# EAGLE board DDS_shield (EAGLE 7.5.0)
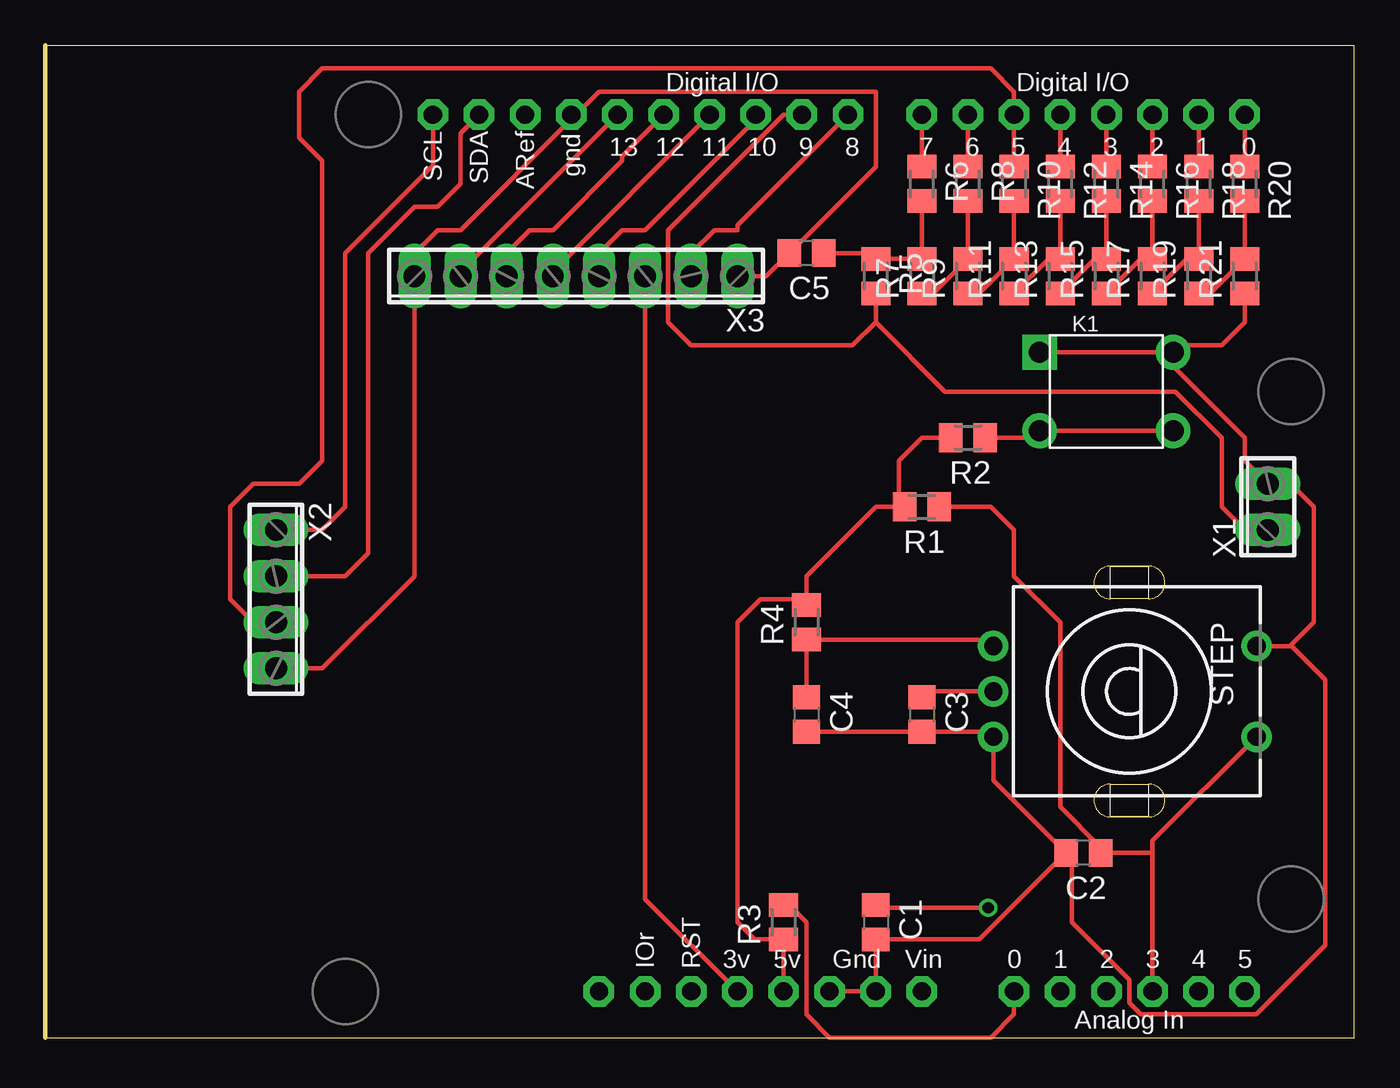
[diagram p0: board, top side]
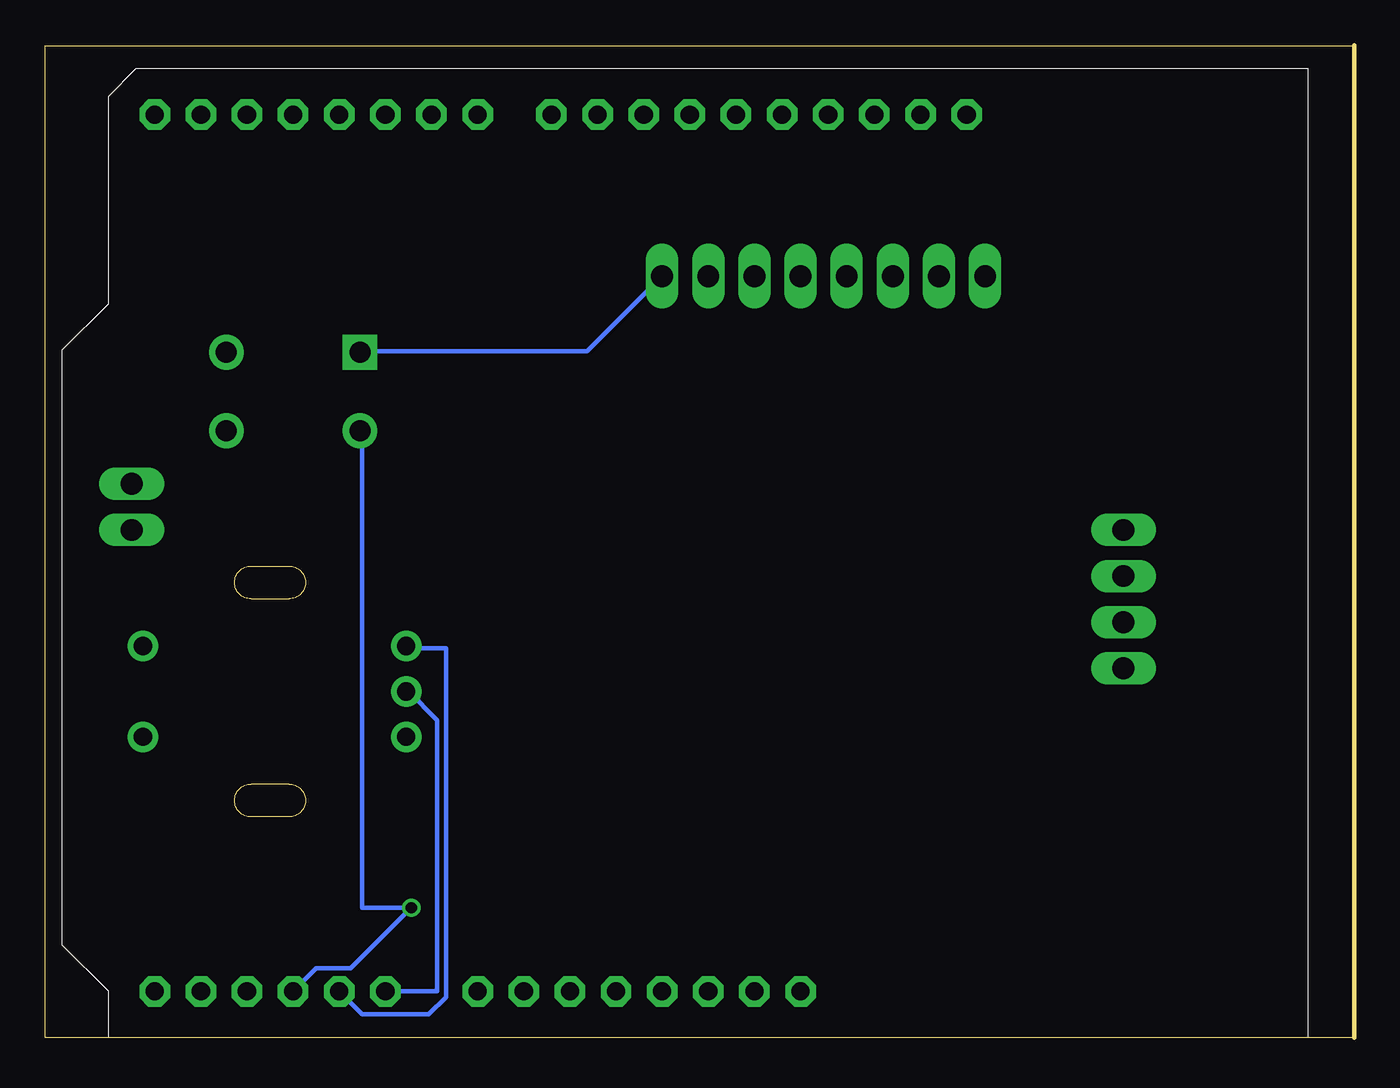
[diagram p1: board, bottom side, seen from below]

Size 72.06 x 54.61 mm. Coordinates in mm from the lower left corner, seen from the top.
Outline: 0,54.6 72.06,54.6 72.06,0 0,0 0,54.61
Copper layers (1*16): Top 0.035mm / dielectric 1.5mm / Bottom 0.035mm
Design rules "default *": minimum track width 10mil, minimum drill 24mil, track to track 8mil, track to pad 8mil, pad to pad 8mil, via to via 8mil, smd to smd 8mil, copper to edge 40mil, drill to drill 8mil, minimum pad ring 10mil, minimum via ring 8mil, stop-mask expansion 4mil, vias tented up to drill 0mil, thermal gap 10mil

## Footprints (pad centres in the part's own frame; a part is rotated, then mirrored left to right if it is on the bottom)
C0805 = smd 1.3 x 1.5: 1 -0.95,0; 2 0.95,0
SW4-6.0X6.0X5.0MM = drill 1.143 pad 1.905 square: 1 -3.683,2.159 | drill 1.143 pad 1.905: 2 -3.683,-2.159; 3 3.683,-2.159; 4 3.683,2.159
M0805 = smd 1.3 x 1.6: 1 -0.95,0; 2 0.95,0
CI-11 = drill 1 pad 1.676: A -2.5,-7.5; B 0,-7.5; C 2.5,-7.5; D -2.5,7; E 2.5,7
ARDUINOR3-BPLACE = drill 1 pad 1.676 octagon: 3V 35.56,2.54; 5V 38.1,2.54; A0 50.8,2.54; A1 53.34,2.54; A2 55.88,2.54; A3 58.42,2.54; A4 60.96,2.54; A5 63.5,2.54; AREF 23.876,50.8; D0 63.5,50.8; D1 60.96,50.8; D2 58.42,50.8; D3 55.88,50.8; D4 53.34,50.8; D5 50.8,50.8; D6 48.26,50.8; D7 45.72,50.8; D8 41.656,50.8; D9 39.116,50.8; D10 36.576,50.8; D11 34.036,50.8; D12 31.496,50.8; D13 28.956,50.8; GND 26.416,50.8; GND1 43.18,2.54; GND2 40.64,2.54; IOREF 30.48,2.54; RESERVED 27.94,2.54; RESET 33.02,2.54; SCL 18.796,50.8; SDA 21.336,50.8; VIN 45.72,2.54
2POL254 = drill 1.2 long: 1 -1.27,0; 2 1.27,0
4POL254 = drill 1.2 long: 1 -3.81,0; 2 -1.27,0; 3 1.27,0; 4 3.81,0
8POL254 = drill 1.2 long: 1 -8.89,0; 2 -6.35,0; 3 -3.81,0; 4 -1.27,0; 5 1.27,0; 6 3.81,0; 7 6.35,0; 8 8.89,0

## Placement (x,y rotation side)
C1  10n  [C0805]  45.72,6.35 270 top
C2  10n  [C0805]  57.15,10.16 180 top
C3  10n  [C0805]  48.26,17.78 270 top
C4  10n  [C0805]  41.91,17.78 270 top
C5  47...200p  [C0805]  41.91,43.18 180 top
K1  mode  [SW4-6.0X6.0X5.0MM]  58.42,35.56 0 top
R1  1k  [M0805]  48.26,29.21 180 top
R2  10k  [M0805]  50.8,33.02 180 top
R3  10k  [M0805]  40.64,6.35 90 top
R4  10k  [M0805]  41.91,22.86 90 top
R5  1k  [M0805]  45.72,41.91 270 top
R6  2k  [M0805]  48.26,46.99 270 top
R7  1k  [M0805]  48.26,41.91 90 top
R8  2k  [M0805]  50.8,46.99 270 top
R9  1k  [M0805]  50.8,41.91 90 top
R10  2k  [M0805]  53.34,46.99 270 top
R11  1k  [M0805]  53.34,41.91 90 top
R12  2k  [M0805]  55.88,46.99 270 top
R13  1k  [M0805]  55.88,41.91 90 top
R14  2k  [M0805]  58.42,46.99 270 top
R15  1k  [M0805]  58.42,41.91 90 top
R16  2k  [M0805]  60.96,46.99 270 top
R17  1k  [M0805]  60.96,41.91 90 top
R18  2k  [M0805]  63.5,46.99 270 top
R19  1k  [M0805]  63.5,41.91 90 top
R20  2k  [M0805]  66.04,46.99 270 top
R21  2k  [M0805]  66.04,41.91 90 top
STEP  CI-11  [CI-11]  59.69,19.05 270 top
U1  ARDUINOR3-BPLACE  [ARDUINOR3-BPLACE]  2.54,0 0 top
X1  F-out  [2POL254]  67.31,29.21 90 top
X2  Input  [4POL254]  12.7,24.13 270 top
X3  screen  [8POL254]  29.21,41.91 180 top

## Library data of the parts
C1-C5 R2-R21 = rcl
K1 = Seeed-OPL-Button; MPN: TS-1109
R1 = rcl; R1: 1k
STEP = piher
U1 = adafruit
X1-X3 = con-phoenix-254

## Nets
GND: C1.2 C2.2 C3.2 C4.2 C5.2 K1.1 K1.4 R21.1 STEP.C STEP.D U1.GND U1.GND1 U1.GND2 X1.2 X2.4 X3.1 X3.8
N$1: C1.1 K1.2 K1.3 R2.1 U1.A2
N$2: C2.1 R1.1 STEP.E U1.A3
N$3: R1.2 R2.2 R3.1 R4.2 U1.5V
N$4: C4.1 R4.1 STEP.A U1.A1
N$5: C3.1 R3.2 STEP.B U1.A0
N$6: R5.2 U1.D9 X1.1
N$7: C5.1 R5.1 R6.2 R7.2
N$8: R6.1 U1.D7
N$9: R8.1 U1.D6
N$10: R10.1 U1.D5 X2.3
N$11: R12.1 U1.D4
N$12: R20.1 U1.D0
N$13: R18.1 U1.D1
N$14: R7.1 R8.2 R9.2
N$15: R14.1 U1.D3
N$16: R16.1 U1.D2
N$17: R9.1 R10.2 R11.2
N$18: R11.1 R12.2 R13.2
N$19: R13.1 R14.2 R15.2
N$20: R15.1 R16.2 R17.2
N$21: R17.1 R18.2 R19.2
N$22: R19.1 R20.2 R21.2
N$23: U1.D8 X3.2
N$24: U1.SDA X2.2
N$25: U1.SCL X2.1
N$26: U1.3V X3.3
N$27: U1.D10 X3.4
N$28: U1.D11 X3.5
N$29: U1.D12 X3.6
N$30: U1.D13 X3.7
VIN: U1.VIN

## Tracks (layer width: path | path; a pad name or v marks a point on that pad's centre or on a via)
GND
  Top 0.254: R21.1 66.04,39.37 64.77,38.1 62.48,38.1 K1.4 | K1.4 62.1,36.96 66.04,33.02 66.04,31.75 X1.2 68.58,30.48 69.85,29.21 69.85,22.86 68.58,21.59 | X3.1 39.69,41.91 C5.2 45.72,47.94 45.72,52.07 30.48,52.07 28.96,50.55 | STEP.D 68.54,21.55 68.58,21.59 | U1.GND 28.96,50.55 | 28.96,50.55 22.86,44.45 21.59,44.45 20.32,43.18 X3.8 20.32,25.4 15.24,20.32 X2.4 | K1.1 K1.4 | C4.2 C3.2 51.91,16.83 STEP.C 52.19,14.17 C2.2 | U1.GND2 U1.GND1 C1.2 51.44,5.4 C2.2 | 68.58,21.59 70.48,19.68 70.48,5.08 66.67,1.27 60.33,1.27 59.69,1.91 59.69,3.17 56.52,6.35 56.52,10.16 C2.2
  Bottom 0.254: X3.1 42.23,37.78 54.61,37.78 K1.1
N$1  (via drill 0.61)
  Top 0.254: R2.1 54.36,33.02 K1.2 K1.3 | v51.91,7.14 45.72,7.14 C1.1
  Bottom 0.254: U1.A2 57.15,3.81 55.25,3.81 v51.91,7.14 54.61,7.14 54.61,33.34 K1.2
N$2
  Top 0.254: U1.A3 60.96,10.16 | 60.96,10.16 60.96,10.82 STEP.E | 60.96,10.16 C2.1 58.1,10.48 55.88,12.7 55.88,22.86 53.34,25.4 53.34,27.94 52.07,29.21 R1.1
N$3
  Top 0.254: R2.2 48.26,33.02 46.99,31.75 46.99,29.53 R1.2 45.72,29.21 41.91,25.4 R4.2 41.59,24.13 39.37,24.13 38.1,22.86 38.1,6.35 39.05,5.4 R3.1 U1.5V
N$4
  Top 0.254: STEP.A 51.83,21.91 R4.1 C4.1
  Bottom 0.254: U1.A1 54.61,1.27 50.96,1.27 50.01,2.22 50.01,21.43 52.07,21.43 STEP.A
N$5
  Top 0.254: STEP.B 48.58,19.05 C3.1 | R3.2 40.96,7.3 41.91,6.35 41.91,1.27 43.18,0 52.07,0 53.34,1.27 U1.A0
  Bottom 0.254: U1.A0 50.48,2.54 50.48,17.46 52.07,19.05 STEP.B
N$6
  Top 0.254: R5.2 45.72,39.37 | 45.72,39.37 49.53,35.56 62.23,35.56 64.77,33.02 64.77,29.21 66.04,27.94 X1.1 | U1.D9 40.64,50.8 34.29,44.45 34.29,39.37 35.56,38.1 44.45,38.1 45.72,39.37
N$7
  Top 0.254: R6.2 R7.2 R5.1 45.4,43.18 C5.1
N$8
  Top 0.254: R6.1 U1.D7
N$9
  Top 0.254: R8.1 U1.D6
N$10
  Top 0.254: R10.1 U1.D5 53.34,52.07 52.07,53.34 15.24,53.34 13.97,52.07 13.97,49.53 15.24,48.26 15.24,31.75 13.97,30.48 11.43,30.48 10.16,29.21 10.16,24.13 11.43,22.86 X2.3
N$11
  Top 0.254: R12.1 U1.D4
N$12
  Top 0.254: R20.1 U1.D0
N$13
  Top 0.254: U1.D1 R18.1
N$14
  Top 0.254: R8.2 R9.2 48.9,40.96 R7.1
N$15
  Top 0.254: R14.1 U1.D3
N$16
  Top 0.254: U1.D2 R16.1
N$17
  Top 0.254: R10.2 R11.2 51.44,40.96 R9.1
N$18
  Top 0.254: R12.2 R13.2 55.24,42.86 R11.1
N$19
  Top 0.254: R14.2 R15.2 57.78,42.86 R13.1
N$20
  Top 0.254: R16.2 R17.2 60.32,42.86 R15.1
N$21
  Top 0.254: R18.2 R19.2 62.86,42.86 R17.1
N$22
  Top 0.254: R20.2 R21.2 64.14,40.96 R19.1
N$23
  Top 0.254: 44.2,50.55 U1.D8 38.1,44.7 38.1,44.45 36.83,44.45 35.56,43.18 X3.2
N$24
  Top 0.254: X2.2 16.51,25.4 17.78,26.67 17.78,43.18 20.32,45.72 21.59,45.72 22.86,46.99 22.86,49.78 U1.SDA
N$25
  Top 0.254: U1.SCL 21.34,48.01 16.51,43.18 16.51,29.21 15.24,27.94 X2.1
N$26
  Top 0.254: X3.3 33.02,7.62 U1.3V
N$27
  Top 0.254: U1.D10 39.12,50.55 33.02,44.45 31.75,44.45 30.48,43.18 X3.4
N$28
  Top 0.254: X3.5 27.94,42.16 U1.D11
N$29
  Top 0.254: X3.6 25.4,43.18 26.67,44.45 27.94,44.45 31.75,48.26 31.75,48.51 U1.D12
N$30
  Top 0.254: X3.7 22.86,42.16 U1.D13